# EAGLE board SOIC-panel-8-16 (EAGLE 6.5.0)
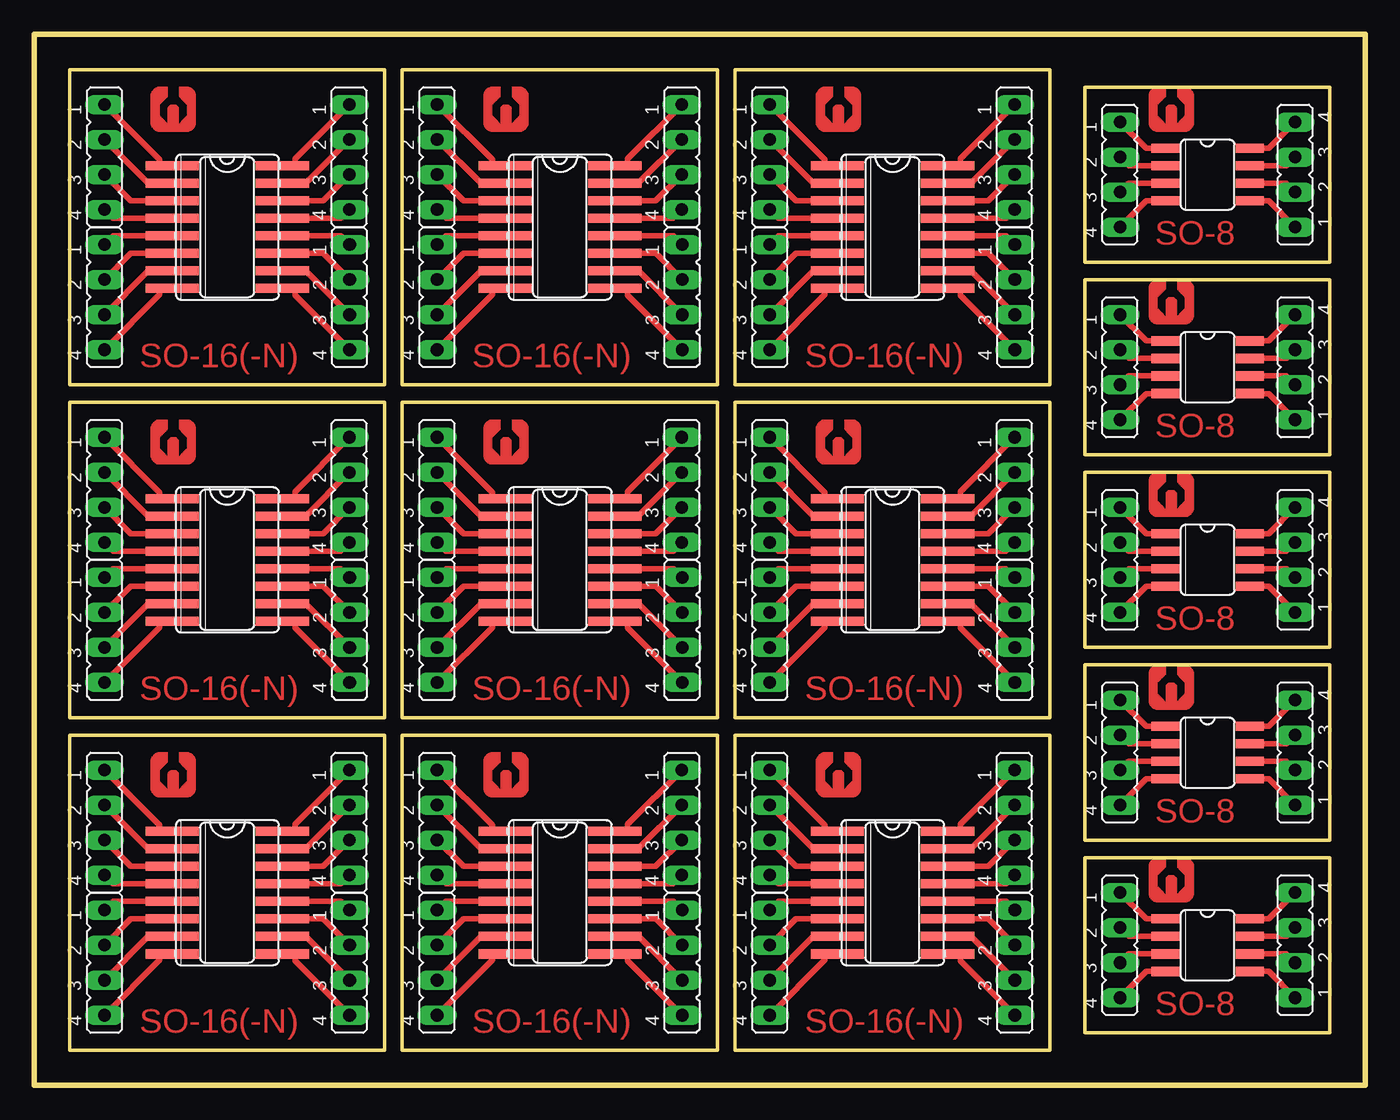
[diagram p0: board, top side]

Size 96.52 x 76.2 mm. Coordinates in mm from the lower left corner, seen from the top.
Outline: 2.54,2.54 2.54,25.4 25.4,25.4 25.4,2.54 2.54,2.54
Outline: 76.2,59.69 76.2,72.39 93.98,72.39 93.98,59.69 76.2,59.69
Outline: 0,0 0,76.2 96.52,76.2 96.52,0 0,0
Outline: 2.54,26.67 2.54,49.53 25.4,49.53 25.4,26.67 2.54,26.67
Outline: 2.54,50.8 2.54,73.66 25.4,73.66 25.4,50.8 2.54,50.8
Outline: 26.67,2.54 26.67,25.4 49.53,25.4 49.53,2.54 26.67,2.54
Outline: 26.67,26.67 26.67,49.53 49.53,49.53 49.53,26.67 26.67,26.67
Outline: 26.67,50.8 26.67,73.66 49.53,73.66 49.53,50.8 26.67,50.8
Outline: 50.8,2.54 50.8,25.4 73.66,25.4 73.66,2.54 50.8,2.54
Outline: 50.8,26.67 50.8,49.53 73.66,49.53 73.66,26.67 50.8,26.67
Outline: 50.8,50.8 50.8,73.66 73.66,73.66 73.66,50.8 50.8,50.8
Outline: 76.2,45.72 76.2,58.42 93.98,58.42 93.98,45.72 76.2,45.72
Outline: 76.2,31.75 76.2,44.45 93.98,44.45 93.98,31.75 76.2,31.75
Outline: 76.2,17.78 76.2,30.48 93.98,30.48 93.98,17.78 76.2,17.78
Outline: 76.2,3.81 76.2,16.51 93.98,16.51 93.98,3.81 76.2,3.81
Copper layers (1*16): Top 0.035mm / dielectric 1.5mm / Bottom 0.035mm
Design rules "default": minimum track width 10mil, minimum drill 24mil, track to track 8mil, track to pad 8mil, pad to pad 8mil, via to via 8mil, smd to smd 8mil, copper to edge 40mil, drill to drill 8mil, minimum pad ring 10mil, minimum via ring 8mil, stop-mask expansion 4mil, vias tented up to drill 0mil, thermal gap 10mil

## Footprints (pad centres in the part's own frame; a part is rotated, then mirrored left to right if it is on the bottom)
SO08 = smd 0.66 x 2.032: 1 -1.905,-3.073; 2 -0.635,-3.073; 3 0.635,-3.073; 4 1.905,-3.073; 5 1.905,3.073; 6 0.635,3.073; 7 -0.635,3.073; 8 -1.905,3.073
SO16 = smd 0.66 x 2.032: 1 -4.445,-3.073; 2 -3.175,-3.073; 3 -1.905,-3.073; 4 -0.635,-3.073; 5 0.635,-3.073; 6 1.905,-3.073; 7 3.175,-3.073; 8 4.445,-3.073; 9 4.445,3.073; 10 3.175,3.073; 11 1.905,3.073; 12 0.635,3.073; 13 -0.635,3.073; 14 -1.905,3.073; 15 -3.175,3.073; 16 -4.445,3.073
SO16L = smd 0.66 x 2.032: 1 -4.445,-4.902; 2 -3.175,-4.902; 3 -1.905,-4.902; 4 -0.635,-4.902; 5 0.635,-4.902; 6 1.905,-4.902; 7 3.175,-4.902; 8 4.445,-4.902; 9 4.445,4.902; 10 3.175,4.902; 11 1.905,4.902; 12 0.635,4.902; 13 -0.635,4.902; 14 -1.905,4.902; 15 -3.175,4.902; 16 -4.445,4.902
JP4 = drill 0.914 long: 1 -3.81,0; 2 -1.27,0; 3 1.27,0; 4 3.81,0

## Placement (x,y rotation side)
IC1  [SO08]  85.09,66.04 270 top
IC2  DG409DY  [SO16]  13.97,13.97 270 top
IC3  MAX3040CWE  [SO16L]  14,13.97 270 top
IC4  MAX3040CWE  [SO16L]  14,38.1 270 top
IC5  DG409DY  [SO16]  13.97,38.1 270 top
IC6  MAX3040CWE  [SO16L]  14,62.23 270 top
IC7  DG409DY  [SO16]  13.97,62.23 270 top
IC8  MAX3040CWE  [SO16L]  38.13,13.97 270 top
IC9  DG409DY  [SO16]  38.1,13.97 270 top
IC10  MAX3040CWE  [SO16L]  38.13,38.1 270 top
IC11  DG409DY  [SO16]  38.1,38.1 270 top
IC12  MAX3040CWE  [SO16L]  38.13,62.23 270 top
IC13  DG409DY  [SO16]  38.1,62.23 270 top
IC14  MAX3040CWE  [SO16L]  62.26,13.97 270 top
IC15  DG409DY  [SO16]  62.23,13.97 270 top
IC16  MAX3040CWE  [SO16L]  62.26,38.1 270 top
IC17  DG409DY  [SO16]  62.23,38.1 270 top
IC18  MAX3040CWE  [SO16L]  62.26,62.23 270 top
IC19  DG409DY  [SO16]  62.23,62.23 270 top
IC20  [SO08]  85.09,52.07 270 top
IC21  [SO08]  85.09,38.1 270 top
IC22  [SO08]  85.09,24.13 270 top
IC23  [SO08]  85.09,10.16 270 top
JP1  [JP4]  78.74,66.04 270 top
JP2  [JP4]  91.44,66.04 90 top
JP3  [JP4]  5.08,19.05 270 top
JP4  [JP4]  5.08,8.89 270 top
JP5  [JP4]  22.83,19.05 270 top
JP6  [JP4]  22.86,8.89 270 top
JP7  [JP4]  5.08,43.18 270 top
JP8  [JP4]  5.08,33.02 270 top
JP9  [JP4]  22.83,43.18 270 top
JP10  [JP4]  22.86,33.02 270 top
JP11  [JP4]  5.08,67.31 270 top
JP12  [JP4]  5.08,57.15 270 top
JP13  [JP4]  22.83,67.31 270 top
JP14  [JP4]  22.86,57.15 270 top
JP15  [JP4]  29.21,19.05 270 top
JP16  [JP4]  29.21,8.89 270 top
JP17  [JP4]  46.96,19.05 270 top
JP18  [JP4]  46.99,8.89 270 top
JP19  [JP4]  29.21,43.18 270 top
JP20  [JP4]  29.21,33.02 270 top
JP21  [JP4]  46.96,43.18 270 top
JP22  [JP4]  46.99,33.02 270 top
JP23  [JP4]  29.21,67.31 270 top
JP24  [JP4]  29.21,57.15 270 top
JP25  [JP4]  46.96,67.31 270 top
JP26  [JP4]  46.99,57.15 270 top
JP27  [JP4]  53.34,19.05 270 top
JP28  [JP4]  53.34,8.89 270 top
JP29  [JP4]  71.09,19.05 270 top
JP30  [JP4]  71.12,8.89 270 top
JP31  [JP4]  53.34,43.18 270 top
JP32  [JP4]  53.34,33.02 270 top
JP33  [JP4]  71.09,43.18 270 top
JP34  [JP4]  71.12,33.02 270 top
JP35  [JP4]  53.34,67.31 270 top
JP36  [JP4]  53.34,57.15 270 top
JP37  [JP4]  71.09,67.31 270 top
JP38  [JP4]  71.12,57.15 270 top
JP39  [JP4]  78.74,52.07 270 top
JP40  [JP4]  91.44,52.07 90 top
JP41  [JP4]  78.74,38.1 270 top
JP42  [JP4]  91.44,38.1 90 top
JP43  [JP4]  78.74,24.13 270 top
JP44  [JP4]  91.44,24.13 90 top
JP45  [JP4]  78.74,10.16 270 top
JP46  [JP4]  91.44,10.16 90 top

## Library data of the parts
IC1 IC20-IC23 = maxim; OC_FARNELL: unknown; OC_NEWARK: unknown
IC2 IC5 IC7 IC9 IC11 IC13 IC15 IC17 IC19 = maxim; MF: MAXIM; MPN: DG409DY; OC_FARNELL: 9663835; OC_NEWARK: 90C1278
IC3 IC4 IC6 IC8 IC10 IC12 IC14 IC16 IC18 = maxim; MPN: MAX3040CWE+; OC_FARNELL: unknown; OC_NEWARK: 68K4574
JP1-JP46 = jumper

## Nets
N$1: IC1.1 JP1.1
N$2: IC1.2 JP1.2
N$3: IC1.3 JP1.3
N$4: IC1.4 JP1.4
N$5: IC1.5 JP2.1
N$6: IC1.6 JP2.2
N$7: IC1.7 JP2.3
N$8: IC2.1 IC3.1 JP3.1
N$9: IC1.8 JP2.4
N$10: IC2.3 IC3.3 JP3.3
N$11: IC2.2 IC3.2 JP3.2
N$12: IC2.4 IC3.4 JP3.4
N$13: IC2.5 IC3.5 JP4.1
N$14: IC2.6 IC3.6 JP4.2
N$15: IC2.7 IC3.7 JP4.3
N$16: IC2.8 IC3.8 JP4.4
N$17: IC2.13 IC3.13 JP5.4
N$18: IC2.9 IC3.9 JP6.4
N$19: IC2.10 IC3.10 JP6.3
N$20: IC2.12 IC3.12 JP6.1
N$21: IC2.11 IC3.11 JP6.2
N$22: IC2.15 IC3.15 JP5.2
N$23: IC2.14 IC3.14 JP5.3
N$24: IC4.1 IC5.1 JP7.1
N$25: IC2.16 IC3.16 JP5.1
N$26: IC4.2 IC5.2 JP7.2
N$27: IC4.3 IC5.3 JP7.3
N$28: IC4.4 IC5.4 JP7.4
N$29: IC4.5 IC5.5 JP8.1
N$30: IC4.6 IC5.6 JP8.2
N$31: IC4.7 IC5.7 JP8.3
N$32: IC4.8 IC5.8 JP8.4
N$33: IC4.9 IC5.9 JP10.4
N$34: IC4.10 IC5.10 JP10.3
N$35: IC4.11 IC5.11 JP10.2
N$36: IC4.12 IC5.12 JP10.1
N$37: IC4.13 IC5.13 JP9.4
N$38: IC4.14 IC5.14 JP9.3
N$39: IC4.15 IC5.15 JP9.2
N$40: IC4.16 IC5.16 JP9.1
N$41: IC6.1 IC7.1 JP11.1
N$42: IC6.2 IC7.2 JP11.2
N$43: IC6.3 IC7.3 JP11.3
N$44: IC6.4 IC7.4 JP11.4
N$45: IC6.5 IC7.5 JP12.1
N$46: IC6.6 IC7.6 JP12.2
N$47: IC6.7 IC7.7 JP12.3
N$48: IC6.8 IC7.8 JP12.4
N$49: IC6.9 IC7.9 JP14.4
N$50: IC6.10 IC7.10 JP14.3
N$51: IC6.11 IC7.11 JP14.2
N$52: IC6.12 IC7.12 JP14.1
N$53: IC6.13 IC7.13 JP13.4
N$54: IC6.14 IC7.14 JP13.3
N$55: IC6.15 IC7.15 JP13.2
N$56: IC6.16 IC7.16 JP13.1
N$57: IC8.1 IC9.1 JP15.1
N$58: IC8.2 IC9.2 JP15.2
N$59: IC8.3 IC9.3 JP15.3
N$60: IC8.4 IC9.4 JP15.4
N$61: IC8.5 IC9.5 JP16.1
N$62: IC8.6 IC9.6 JP16.2
N$63: IC8.7 IC9.7 JP16.3
N$64: IC8.8 IC9.8 JP16.4
N$65: IC8.9 IC9.9 JP18.4
N$66: IC8.10 IC9.10 JP18.3
N$67: IC8.11 IC9.11 JP18.2
N$68: IC8.12 IC9.12 JP18.1
N$69: IC8.13 IC9.13 JP17.4
N$70: IC8.14 IC9.14 JP17.3
N$71: IC8.15 IC9.15 JP17.2
N$72: IC8.16 IC9.16 JP17.1
N$73: IC10.1 IC11.1 JP19.1
N$74: IC10.2 IC11.2 JP19.2
N$75: IC10.3 IC11.3 JP19.3
N$76: IC10.4 IC11.4 JP19.4
N$77: IC10.5 IC11.5 JP20.1
N$78: IC10.6 IC11.6 JP20.2
N$79: IC10.7 IC11.7 JP20.3
N$80: IC10.8 IC11.8 JP20.4
N$81: IC10.9 IC11.9 JP22.4
N$82: IC10.10 IC11.10 JP22.3
N$83: IC10.11 IC11.11 JP22.2
N$84: IC10.12 IC11.12 JP22.1
N$85: IC10.13 IC11.13 JP21.4
N$86: IC10.14 IC11.14 JP21.3
N$87: IC10.15 IC11.15 JP21.2
N$88: IC10.16 IC11.16 JP21.1
N$89: IC12.1 IC13.1 JP23.1
N$90: IC12.2 IC13.2 JP23.2
N$91: IC12.3 IC13.3 JP23.3
N$92: IC12.4 IC13.4 JP23.4
N$93: IC12.5 IC13.5 JP24.1
N$94: IC12.6 IC13.6 JP24.2
N$95: IC12.7 IC13.7 JP24.3
N$96: IC12.8 IC13.8 JP24.4
N$97: IC12.9 IC13.9 JP26.4
N$98: IC12.10 IC13.10 JP26.3
N$99: IC12.11 IC13.11 JP26.2
N$100: IC12.12 IC13.12 JP26.1
N$101: IC12.13 IC13.13 JP25.4
N$102: IC12.14 IC13.14 JP25.3
N$103: IC12.15 IC13.15 JP25.2
N$104: IC12.16 IC13.16 JP25.1
N$105: IC14.1 IC15.1 JP27.1
N$106: IC14.2 IC15.2 JP27.2
N$107: IC14.3 IC15.3 JP27.3
N$108: IC14.4 IC15.4 JP27.4
N$109: IC14.5 IC15.5 JP28.1
N$110: IC14.6 IC15.6 JP28.2
N$111: IC14.7 IC15.7 JP28.3
N$112: IC14.8 IC15.8 JP28.4
N$113: IC14.9 IC15.9 JP30.4
N$114: IC14.10 IC15.10 JP30.3
N$115: IC14.11 IC15.11 JP30.2
N$116: IC14.12 IC15.12 JP30.1
N$117: IC14.13 IC15.13 JP29.4
N$118: IC14.14 IC15.14 JP29.3
N$119: IC14.15 IC15.15 JP29.2
N$120: IC14.16 IC15.16 JP29.1
N$121: IC16.1 IC17.1 JP31.1
N$122: IC16.2 IC17.2 JP31.2
N$123: IC16.3 IC17.3 JP31.3
N$124: IC16.4 IC17.4 JP31.4
N$125: IC16.5 IC17.5 JP32.1
N$126: IC16.6 IC17.6 JP32.2
N$127: IC16.7 IC17.7 JP32.3
N$128: IC16.8 IC17.8 JP32.4
N$129: IC16.9 IC17.9 JP34.4
N$130: IC16.10 IC17.10 JP34.3
N$131: IC16.11 IC17.11 JP34.2
N$132: IC16.12 IC17.12 JP34.1
N$133: IC16.13 IC17.13 JP33.4
N$134: IC16.14 IC17.14 JP33.3
N$135: IC16.15 IC17.15 JP33.2
N$136: IC16.16 IC17.16 JP33.1
N$137: IC18.1 IC19.1 JP35.1
N$138: IC18.2 IC19.2 JP35.2
N$139: IC18.3 IC19.3 JP35.3
N$140: IC18.4 IC19.4 JP35.4
N$141: IC18.5 IC19.5 JP36.1
N$142: IC18.6 IC19.6 JP36.2
N$143: IC18.7 IC19.7 JP36.3
N$144: IC18.8 IC19.8 JP36.4
N$145: IC18.9 IC19.9 JP38.4
N$146: IC18.10 IC19.10 JP38.3
N$147: IC18.11 IC19.11 JP38.2
N$148: IC18.12 IC19.12 JP38.1
N$149: IC18.13 IC19.13 JP37.4
N$150: IC18.14 IC19.14 JP37.3
N$151: IC18.15 IC19.15 JP37.2
N$152: IC18.16 IC19.16 JP37.1
N$153: IC20.1 JP39.1
N$154: IC20.2 JP39.2
N$155: IC20.3 JP39.3
N$156: IC20.4 JP39.4
N$157: IC20.5 JP40.1
N$158: IC20.6 JP40.2
N$159: IC20.7 JP40.3
N$160: IC20.8 JP40.4
N$161: IC21.1 JP41.1
N$162: IC21.2 JP41.2
N$163: IC21.3 JP41.3
N$164: IC21.4 JP41.4
N$165: IC21.5 JP42.1
N$166: IC21.6 JP42.2
N$167: IC21.7 JP42.3
N$168: IC21.8 JP42.4
N$169: IC22.1 JP43.1
N$170: IC22.2 JP43.2
N$171: IC22.3 JP43.3
N$172: IC22.4 JP43.4
N$173: IC22.5 JP44.1
N$174: IC22.6 JP44.2
N$175: IC22.7 JP44.3
N$176: IC22.8 JP44.4
N$177: IC23.1 JP45.1
N$178: IC23.2 JP45.2
N$179: IC23.3 JP45.3
N$180: IC23.4 JP45.4
N$181: IC23.5 JP46.1
N$182: IC23.6 JP46.2
N$183: IC23.7 JP46.3
N$184: IC23.8 JP46.4

## Tracks (layer width: path | path; a pad name or v marks a point on that pad's centre or on a via)
N$1
  Top 0.406: IC1.1 80.64,67.94 JP1.1
N$2
  Top 0.406: IC1.2 79.38,66.67 JP1.2
N$3
  Top 0.406: IC1.3 79.38,65.41 JP1.3
N$4
  Top 0.406: IC1.4 80.64,64.14 JP1.4
N$5
  Top 0.406: IC1.5 89.53,64.14 JP2.1
N$6
  Top 0.406: IC1.6 90.81,65.41 JP2.2
N$7
  Top 0.406: IC1.7 90.81,66.67 JP2.3
N$8
  Top 0.406: IC2.1 IC3.1 9.09,18.85 JP3.1
N$9
  Top 0.406: IC1.8 89.53,67.94 JP2.4
N$10
  Top 0.406: IC2.3 IC3.3 6.99,15.88 JP3.3
N$11
  Top 0.406: IC2.2 IC3.2 8.26,17.14 JP3.2
N$12
  Top 0.406: IC2.4 IC3.4 5.71,14.61 JP3.4
N$13
  Top 0.406: IC2.5 IC3.5 5.71,13.34 JP4.1
N$14
  Top 0.406: IC2.6 IC3.6 6.99,12.06 JP4.2
N$15
  Top 0.406: IC2.7 IC3.7 8.26,10.79 JP4.3
N$16
  Top 0.406: IC2.8 IC3.8 9.09,9.09 JP4.4
N$17
  Top 0.406: IC2.13 IC3.13 22.2,14.61 JP5.4
N$18
  Top 0.406: IC2.9 IC3.9 18.9,9.04 JP6.4
N$19
  Top 0.406: IC2.10 IC3.10 19.68,10.79 JP6.3
N$20
  Top 0.406: IC2.12 IC3.12 22.23,13.34 JP6.1
N$21
  Top 0.406: IC2.11 IC3.11 20.95,12.06 JP6.2
N$22
  Top 0.406: IC2.15 IC3.15 19.66,17.14 JP5.2
N$23
  Top 0.406: IC2.14 IC3.14 20.93,15.88 JP5.3
N$24
  Top 0.406: IC5.1 IC4.1 9.09,42.98 JP7.1
N$25
  Top 0.406: IC2.16 IC3.16 18.9,18.92 JP5.1
N$26
  Top 0.406: IC5.2 IC4.2 8.26,41.27 JP7.2
N$27
  Top 0.406: IC5.3 IC4.3 6.99,40.01 JP7.3
N$28
  Top 0.406: IC5.4 IC4.4 5.71,38.73 JP7.4
N$29
  Top 0.406: IC5.5 IC4.5 5.71,37.47 JP8.1
N$30
  Top 0.406: IC5.6 IC4.6 6.99,36.2 JP8.2
N$31
  Top 0.406: IC5.7 IC4.7 8.26,34.92 JP8.3
N$32
  Top 0.406: IC5.8 IC4.8 9.09,33.22 JP8.4
N$33
  Top 0.406: IC5.9 IC4.9 18.9,33.17 JP10.4
N$34
  Top 0.406: IC5.10 IC4.10 19.68,34.92 JP10.3
N$35
  Top 0.406: IC5.11 IC4.11 20.95,36.2 JP10.2
N$36
  Top 0.406: IC5.12 IC4.12 22.23,37.47 JP10.1
N$37
  Top 0.406: IC5.13 IC4.13 22.2,38.73 JP9.4
N$38
  Top 0.406: IC5.14 IC4.14 20.93,40.01 JP9.3
N$39
  Top 0.406: IC5.15 IC4.15 19.66,41.27 JP9.2
N$40
  Top 0.406: IC5.16 IC4.16 18.9,43.05 JP9.1
N$41
  Top 0.406: IC7.1 IC6.1 9.09,67.11 JP11.1
N$42
  Top 0.406: IC7.2 IC6.2 8.26,65.41 JP11.2
N$43
  Top 0.406: IC7.3 IC6.3 6.99,64.14 JP11.3
N$44
  Top 0.406: IC7.4 IC6.4 5.71,62.87 JP11.4
N$45
  Top 0.406: IC7.5 IC6.5 5.71,61.59 JP12.1
N$46
  Top 0.406: IC7.6 IC6.6 6.99,60.33 JP12.2
N$47
  Top 0.406: IC7.7 IC6.7 8.26,59.05 JP12.3
N$48
  Top 0.406: IC7.8 IC6.8 9.09,57.35 JP12.4
N$49
  Top 0.406: IC7.9 IC6.9 18.9,57.3 JP14.4
N$50
  Top 0.406: IC7.10 IC6.10 19.68,59.05 JP14.3
N$51
  Top 0.406: IC7.11 IC6.11 20.95,60.33 JP14.2
N$52
  Top 0.406: IC7.12 IC6.12 22.23,61.59 JP14.1
N$53
  Top 0.406: IC7.13 IC6.13 22.2,62.87 JP13.4
N$54
  Top 0.406: IC7.14 IC6.14 20.93,64.14 JP13.3
N$55
  Top 0.406: IC7.15 IC6.15 19.66,65.41 JP13.2
N$56
  Top 0.406: IC7.16 IC6.16 18.9,67.18 JP13.1
N$57
  Top 0.406: IC9.1 IC8.1 33.22,18.85 JP15.1
N$58
  Top 0.406: IC9.2 IC8.2 32.38,17.14 JP15.2
N$59
  Top 0.406: IC9.3 IC8.3 31.11,15.88 JP15.3
N$60
  Top 0.406: IC9.4 IC8.4 29.84,14.61 JP15.4
N$61
  Top 0.406: IC9.5 IC8.5 29.84,13.34 JP16.1
N$62
  Top 0.406: IC9.6 IC8.6 31.11,12.06 JP16.2
N$63
  Top 0.406: IC9.7 IC8.7 32.38,10.79 JP16.3
N$64
  Top 0.406: IC9.8 IC8.8 33.22,9.09 JP16.4
N$65
  Top 0.406: IC9.9 IC8.9 43.03,9.04 JP18.4
N$66
  Top 0.406: IC9.10 IC8.10 43.81,10.79 JP18.3
N$67
  Top 0.406: IC9.11 IC8.11 45.09,12.06 JP18.2
N$68
  Top 0.406: IC9.12 IC8.12 46.35,13.34 JP18.1
N$69
  Top 0.406: IC9.13 IC8.13 46.33,14.61 JP17.4
N$70
  Top 0.406: IC9.14 IC8.14 45.06,15.88 JP17.3
N$71
  Top 0.406: IC9.15 IC8.15 43.79,17.14 JP17.2
N$72
  Top 0.406: IC9.16 IC8.16 43.03,18.92 JP17.1
N$73
  Top 0.406: IC11.1 IC10.1 33.22,42.98 JP19.1
N$74
  Top 0.406: IC11.2 IC10.2 32.38,41.27 JP19.2
N$75
  Top 0.406: IC11.3 IC10.3 31.11,40.01 JP19.3
N$76
  Top 0.406: IC11.4 IC10.4 29.84,38.73 JP19.4
N$77
  Top 0.406: IC11.5 IC10.5 29.84,37.47 JP20.1
N$78
  Top 0.406: IC11.6 IC10.6 31.11,36.2 JP20.2
N$79
  Top 0.406: IC11.7 IC10.7 32.38,34.92 JP20.3
N$80
  Top 0.406: IC11.8 IC10.8 33.22,33.22 JP20.4
N$81
  Top 0.406: IC11.9 IC10.9 43.03,33.17 JP22.4
N$82
  Top 0.406: IC11.10 IC10.10 43.81,34.92 JP22.3
N$83
  Top 0.406: IC11.11 IC10.11 45.09,36.2 JP22.2
N$84
  Top 0.406: IC11.12 IC10.12 46.35,37.47 JP22.1
N$85
  Top 0.406: IC11.13 IC10.13 46.33,38.73 JP21.4
N$86
  Top 0.406: IC11.14 IC10.14 45.06,40.01 JP21.3
N$87
  Top 0.406: IC11.15 IC10.15 43.79,41.27 JP21.2
N$88
  Top 0.406: IC11.16 IC10.16 43.03,43.05 JP21.1
N$89
  Top 0.406: IC13.1 IC12.1 33.22,67.11 JP23.1
N$90
  Top 0.406: IC13.2 IC12.2 32.38,65.41 JP23.2
N$91
  Top 0.406: IC13.3 IC12.3 31.11,64.14 JP23.3
N$92
  Top 0.406: IC13.4 IC12.4 29.84,62.87 JP23.4
N$93
  Top 0.406: IC13.5 IC12.5 29.84,61.59 JP24.1
N$94
  Top 0.406: IC13.6 IC12.6 31.11,60.33 JP24.2
N$95
  Top 0.406: IC13.7 IC12.7 32.38,59.05 JP24.3
N$96
  Top 0.406: IC13.8 IC12.8 33.22,57.35 JP24.4
N$97
  Top 0.406: IC13.9 IC12.9 43.03,57.3 JP26.4
N$98
  Top 0.406: IC13.10 IC12.10 43.81,59.05 JP26.3
N$99
  Top 0.406: IC13.11 IC12.11 45.09,60.33 JP26.2
N$100
  Top 0.406: IC13.12 IC12.12 46.35,61.59 JP26.1
N$101
  Top 0.406: IC13.13 IC12.13 46.33,62.87 JP25.4
N$102
  Top 0.406: IC13.14 IC12.14 45.06,64.14 JP25.3
N$103
  Top 0.406: IC13.15 IC12.15 43.79,65.41 JP25.2
N$104
  Top 0.406: IC13.16 IC12.16 43.03,67.18 JP25.1
N$105
  Top 0.406: IC15.1 IC14.1 57.35,18.85 JP27.1
N$106
  Top 0.406: IC15.2 IC14.2 56.52,17.14 JP27.2
N$107
  Top 0.406: IC15.3 IC14.3 55.24,15.88 JP27.3
N$108
  Top 0.406: IC15.4 IC14.4 53.98,14.61 JP27.4
N$109
  Top 0.406: IC15.5 IC14.5 53.98,13.34 JP28.1
N$110
  Top 0.406: IC15.6 IC14.6 55.24,12.06 JP28.2
N$111
  Top 0.406: IC15.7 IC14.7 56.52,10.79 JP28.3
N$112
  Top 0.406: IC15.8 IC14.8 57.35,9.09 JP28.4
N$113
  Top 0.406: IC15.9 IC14.9 67.16,9.04 JP30.4
N$114
  Top 0.406: IC15.10 IC14.10 67.94,10.79 JP30.3
N$115
  Top 0.406: IC15.11 IC14.11 69.22,12.06 JP30.2
N$116
  Top 0.406: IC15.12 IC14.12 70.48,13.34 JP30.1
N$117
  Top 0.406: IC15.13 IC14.13 70.46,14.61 JP29.4
N$118
  Top 0.406: IC15.14 IC14.14 69.19,15.88 JP29.3
N$119
  Top 0.406: IC15.15 IC14.15 67.92,17.14 JP29.2
N$120
  Top 0.406: IC15.16 IC14.16 67.16,18.92 JP29.1
N$121
  Top 0.406: IC17.1 IC16.1 57.35,42.98 JP31.1
N$122
  Top 0.406: IC17.2 IC16.2 56.52,41.27 JP31.2
N$123
  Top 0.406: IC17.3 IC16.3 55.24,40.01 JP31.3
N$124
  Top 0.406: IC17.4 IC16.4 53.98,38.73 JP31.4
N$125
  Top 0.406: IC17.5 IC16.5 53.98,37.47 JP32.1
N$126
  Top 0.406: IC17.6 IC16.6 55.24,36.2 JP32.2
N$127
  Top 0.406: IC17.7 IC16.7 56.52,34.92 JP32.3
N$128
  Top 0.406: IC17.8 IC16.8 57.35,33.22 JP32.4
N$129
  Top 0.406: IC17.9 IC16.9 67.16,33.17 JP34.4
N$130
  Top 0.406: IC17.10 IC16.10 67.94,34.92 JP34.3
N$131
  Top 0.406: IC17.11 IC16.11 69.22,36.2 JP34.2
N$132
  Top 0.406: IC17.12 IC16.12 70.48,37.47 JP34.1
N$133
  Top 0.406: IC17.13 IC16.13 70.46,38.73 JP33.4
N$134
  Top 0.406: IC17.14 IC16.14 69.19,40.01 JP33.3
N$135
  Top 0.406: IC17.15 IC16.15 67.92,41.27 JP33.2
N$136
  Top 0.406: IC17.16 IC16.16 67.16,43.05 JP33.1
N$137
  Top 0.406: IC19.1 IC18.1 57.35,67.11 JP35.1
N$138
  Top 0.406: IC19.2 IC18.2 56.52,65.41 JP35.2
N$139
  Top 0.406: IC19.3 IC18.3 55.24,64.14 JP35.3
N$140
  Top 0.406: IC19.4 IC18.4 53.98,62.87 JP35.4
N$141
  Top 0.406: IC19.5 IC18.5 53.98,61.59 JP36.1
N$142
  Top 0.406: IC19.6 IC18.6 55.24,60.33 JP36.2
N$143
  Top 0.406: IC19.7 IC18.7 56.52,59.05 JP36.3
N$144
  Top 0.406: IC19.8 IC18.8 57.35,57.35 JP36.4
N$145
  Top 0.406: IC19.9 IC18.9 67.16,57.3 JP38.4
N$146
  Top 0.406: IC19.10 IC18.10 67.94,59.05 JP38.3
N$147
  Top 0.406: IC19.11 IC18.11 69.22,60.33 JP38.2
N$148
  Top 0.406: IC19.12 IC18.12 70.48,61.59 JP38.1
N$149
  Top 0.406: IC19.13 IC18.13 70.46,62.87 JP37.4
N$150
  Top 0.406: IC19.14 IC18.14 69.19,64.14 JP37.3
N$151
  Top 0.406: IC19.15 IC18.15 67.92,65.41 JP37.2
N$152
  Top 0.406: IC19.16 IC18.16 67.16,67.18 JP37.1
N$153
  Top 0.406: IC20.1 80.64,53.98 JP39.1
N$154
  Top 0.406: IC20.2 79.38,52.7 JP39.2
N$155
  Top 0.406: IC20.3 79.38,51.44 JP39.3
N$156
  Top 0.406: IC20.4 80.64,50.16 JP39.4
N$157
  Top 0.406: IC20.5 89.53,50.16 JP40.1
N$158
  Top 0.406: IC20.6 90.81,51.44 JP40.2
N$159
  Top 0.406: IC20.7 90.81,52.7 JP40.3
N$160
  Top 0.406: IC20.8 89.53,53.98 JP40.4
N$161
  Top 0.406: IC21.1 80.64,40.01 JP41.1
N$162
  Top 0.406: IC21.2 79.38,38.73 JP41.2
N$163
  Top 0.406: IC21.3 79.38,37.47 JP41.3
N$164
  Top 0.406: IC21.4 80.64,36.2 JP41.4
N$165
  Top 0.406: IC21.5 89.53,36.2 JP42.1
N$166
  Top 0.406: IC21.6 90.81,37.47 JP42.2
N$167
  Top 0.406: IC21.7 90.81,38.73 JP42.3
N$168
  Top 0.406: IC21.8 89.53,40.01 JP42.4
N$169
  Top 0.406: IC22.1 80.64,26.04 JP43.1
N$170
  Top 0.406: IC22.2 79.38,24.77 JP43.2
N$171
  Top 0.406: IC22.3 79.38,23.5 JP43.3
N$172
  Top 0.406: IC22.4 80.64,22.23 JP43.4
N$173
  Top 0.406: IC22.5 89.53,22.23 JP44.1
N$174
  Top 0.406: IC22.6 90.81,23.5 JP44.2
N$175
  Top 0.406: IC22.7 90.81,24.77 JP44.3
N$176
  Top 0.406: IC22.8 89.53,26.04 JP44.4
N$177
  Top 0.406: IC23.1 80.64,12.06 JP45.1
N$178
  Top 0.406: IC23.2 79.38,10.79 JP45.2
N$179
  Top 0.406: IC23.3 79.38,9.53 JP45.3
N$180
  Top 0.406: IC23.4 80.64,8.26 JP45.4
N$181
  Top 0.406: IC23.5 89.53,8.26 JP46.1
N$182
  Top 0.406: IC23.6 90.81,9.53 JP46.2
N$183
  Top 0.406: IC23.7 90.81,10.79 JP46.3
N$184
  Top 0.406: IC23.8 89.53,12.06 JP46.4
(copper drawn outside any net)
  shapes: Top area x4046

## Text on the board
Top: SO-8 | SO-16(-N) | SO-16(-N) | SO-16(-N) | SO-8 | SO-8 | SO-16(-N) | SO-16(-N) | SO-16(-N) | SO-8 | SO-8 | SO-16(-N) | SO-16(-N) | SO-16(-N)